# Altium PCB pneu-slave.PcbDoc
Units mil, origin at the board's own origin, x right, y up, seen from the top; angles counter-clockwise.
Board outline 1200 x 2000 mil, 2 copper layers (Top, Bottom); 42 components, 37 nets, 153 pads, 165 vias.
Unrouted connection lines stored in the file: 17.
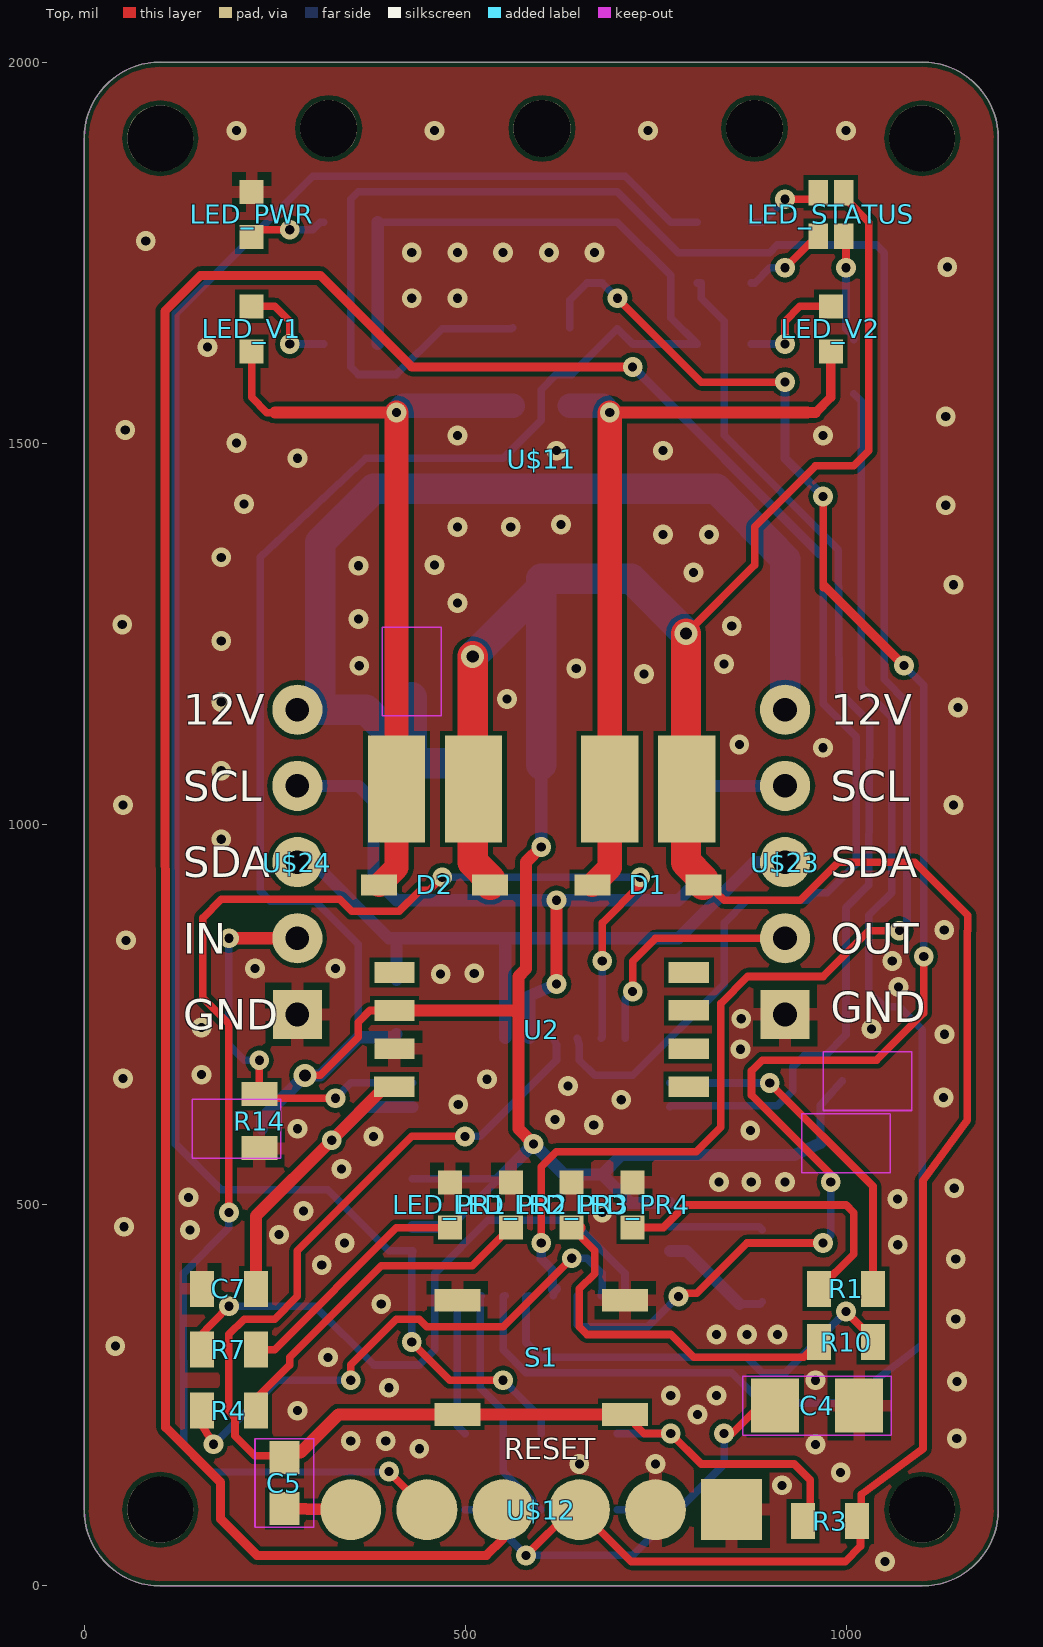
[diagram p0: Top view]
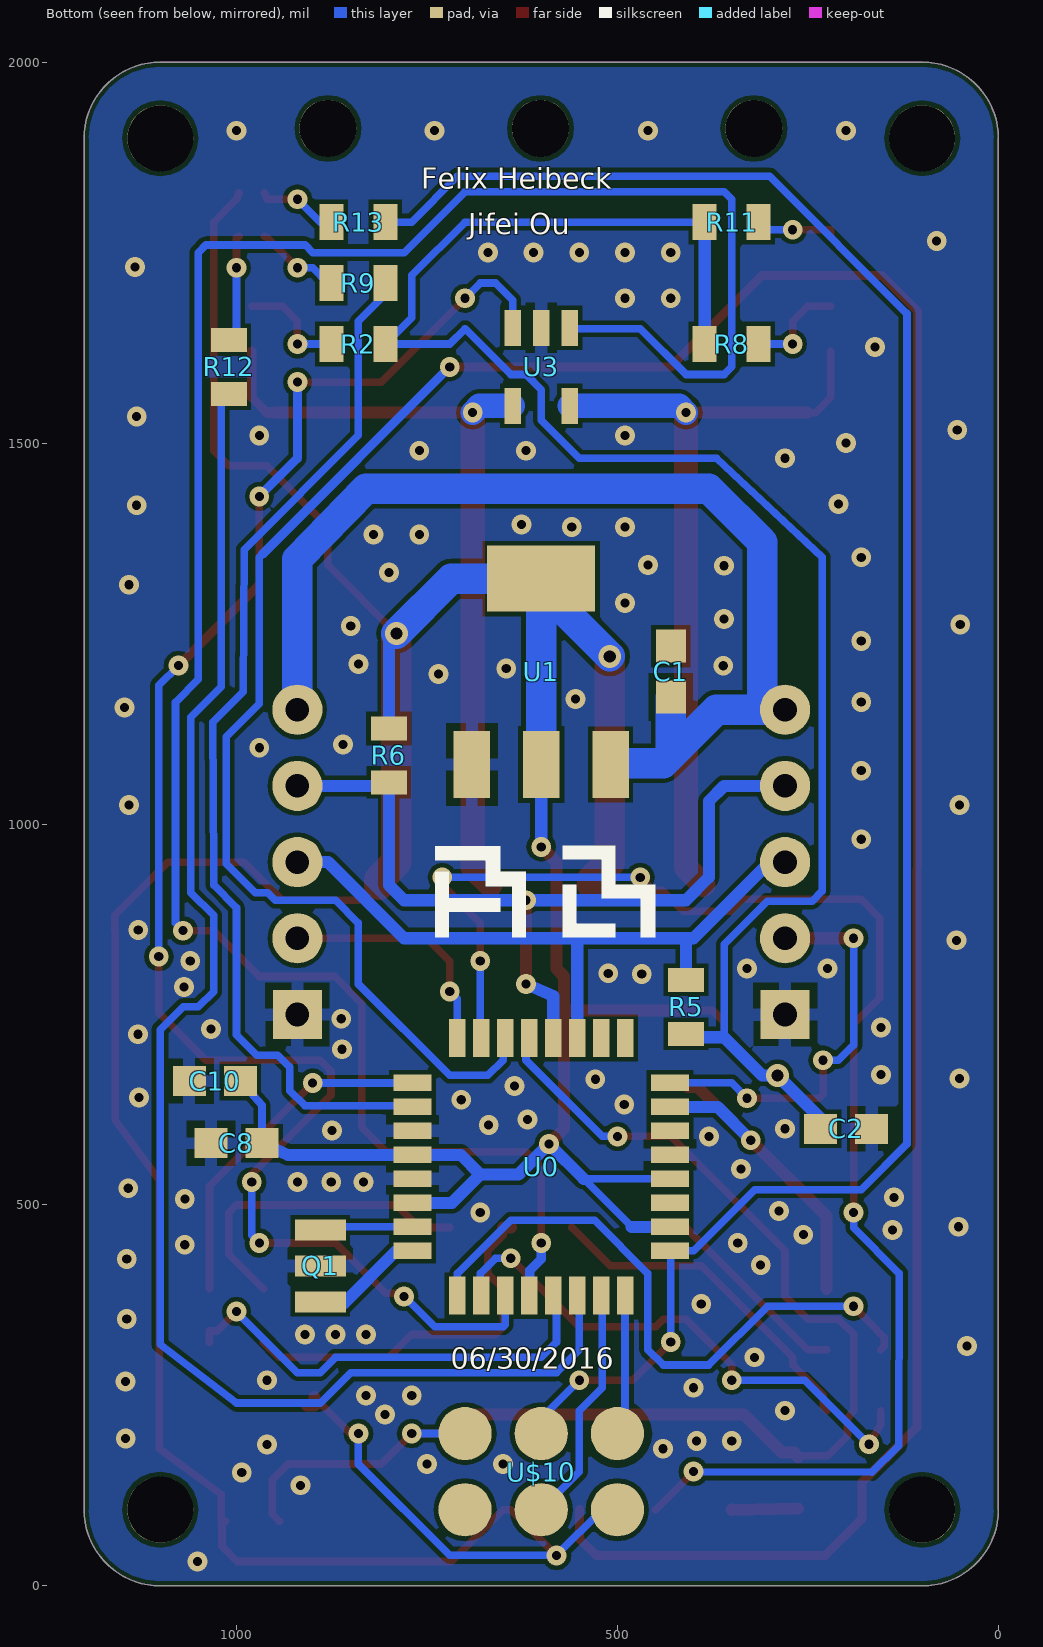
[diagram p1: Bottom view, seen from below]

## Layer stack, top to bottom
Top Solder: solder mask 0.4, Solder Resist, Dk 3.5
Top: signal copper 1.4016
Dielectric 1: dielectric 12.6, FR-4, Dk 4.8
Bottom: signal copper 1.4016
Bottom Solder: solder mask 0.4, Solder Resist, Dk 3.5

## Board outline
100,0 1100,0 ccw(c1100,100) 1200,100 1200,1900 ccw(c1100,1900) 1100,2000 100,2000 ccw(c100,1900) 0,1900 0,100 ccw(c100,100)

## Design rules (kind name [scope] priority, off if disabled: settings)
Clearance "Clearance (Same Net)" [All] p1: gap=6 ignorepadtopadclearanceinfootprint=FALSE
Clearance [All] p2: gap=6 ignorepadtopadclearanceinfootprint=FALSE
HoleSize HoleSize_For_NetClass_vcc [InNetClass('vcc')] p1: absolutevalues=TRUE maxlimit=0 minlimit=0 maxpercent=80.000 minpercent=20.000
HoleSize [All] p2: absolutevalues=TRUE maxlimit=100000 minlimit=12 maxpercent=80.000 minpercent=20.000
HoleToHoleClearance mdDrill [All] p1: gap=6 allowstackedmicrovias=TRUE
PasteMaskExpansion mlMinCreamFrame [All] p1: expansion=0
PolygonConnect ThermalVias [IsVia] p1: connectstyle=Direct reliefconductorwidth=10 reliefentries=4 polygonreliefangle="90 Angle" airgapwidth=10
PolygonConnect [All] p2: connectstyle=Relief reliefconductorwidth=16 reliefentries=4 polygonreliefangle="90 Angle" airgapwidth=10
RoutingVias [All] p1: holewidth=12 width=26 viastyle="Through Hole" minholewidth=12 minwidth=26 maxholewidth=100 maxwidth=100
SolderMaskExpansion mlMinStopFrame [All] p1: expansion=2.5
Width Width_For_NetClass_vcc [InNetClass('vcc')] p1: maxlimit=10 minlimit=10 preferedwidth=10
Width [All] p2: maxlimit=10000 minlimit=6 preferedwidth=6
27 further rules are at their usual default settings.

## Components (designator, comment, footprint, x,y, rotation, side; value= is the part's Value field where it differs from the comment)
C1 "0.1uF" 0603-CAP#1 330,1200 r270 bottom
C2 "0.1uF" 0603-CAP#2 100,600 r180 bottom
C4 "22uF" 1206 862.14,236.64 r0 top
C5 "0.1uF" 0603-CAP#3 163,135 r270 top
C7 "470pF" 0805#1 90,390 r0 top
C8 "0.1uF" 0603-CAP#4 900,581.11 r0 bottom
C10 "0.1uF" 0603-CAP#4 928.33,662.67 r0 bottom
D1 "" SOD-123 640,920 r180 top
D2 "" SOD-123 360,920 r180 top
LED_PR1 "" CHIPLED_0603#1 380,500 r0 top
LED_PR2 "" CHIPLED_0603#1 460,500 r0 top
LED_PR3 "" CHIPLED_0603#1 540,500 r0 top
LED_PR4 "" CHIPLED_0603#1 620,500 r0 top
LED_PWR "" CHIPLED_0603#1 120,1800 r0 top
LED_STATUS "" LTST 880,1800 r0 top
LED_V1 "" CHIPLED_0603#2 120,1650 r180 top
LED_V2 "" CHIPLED_0603#2 880,1650 r180 top
Q1 "16Mhz" RESONATOR-SMD 790,420 r270 bottom
R1 "1k" 0805#1 900,390 r0 top
R2 "1k" 0805#2 740,1630 r180 bottom
R3 "10K" 0805#2 879,85 r180 top
R4 "1k" 0805#2 90,230 r180 top
R5 "4.7k" 0805#3 310,760 r270 bottom
R6 "4.7k" 0805#3 700,1090 r270 bottom
R7 "1k" 0805#2 90,310 r180 top
R8 "1k" 0805#1 250,1630 r0 bottom
R9 "1k" 0805#2 740,1710 r180 bottom
R10 "1k" 0805#1 900,320 r0 top
R11 "1k" 0805#1 250,1790 r0 bottom
R12 "1k" 0805#4 910,1600 r90 bottom
R13 "1k" 0805#2 740,1790 r180 bottom
R14 "10k" 0805#3 130,610 r90 top
S1 "" TACTILE-SWITCH-SMD 500,300 r0 top
U0 "" TQFP32-08 500,550 r180 bottom
U1 "" LINEAR_SOT223 500,1200 r180 bottom
U2 "" MPXHZ6400 500,730 r0 top
U3 "QS5K2" SOT23-5L 500,1600 r0 bottom
U$10 "" POGO_ISP 500,150 r90 bottom
U$11 "" S070C-2 500,2000 r0 top
U$12 "" FTDI_POGO 500,100 r0 top
U$23 "" 1X05_TIGHT 820,950 r90 top
U$24 "" 1X05_TIGHT 180,950 r90 top

## Footprints (in the part's own frame and the unit in brackets; to place one, negate y for a bottom-side part, rotate by r counter-clockwise, add the part's x,y. Pads: shape width x height; smd on the part's side, far side on the other; paste and mask are expansions set on the pad)
1X05_TIGHT [mil] "1X05_TIGHT"
  round 66 / inner round 60 / far side round 66 hole 31: P$1(200,-100) P$2(0,-100) P$3(100,-100) P$4(-100,-100)
  rect 63.9x63.9 / inner rect 60x60 / far side rect 63.9x63.9 hole 31: P$5(-200,-100)
0603-CAP#1 [mm] "0603-CAP"
  rect 1.1x1 smd: 1(-0.85,-2.54) 2(0.85,-2.54)
  Bottom keep-out lines w0.051: 1.473,-1.557 1.473,-3.523 -1.473,-3.523 -1.473,-1.557 1.473,-1.557
0603-CAP#2 [mm] "0603-CAP"
  rect 1.1x1 smd: 1(-3.39,0) 2(-1.69,0)
  Bottom keep-out lines w0.051: -1.067,-0.983 -4.013,-0.983 -4.013,0.983 -1.067,0.983 -1.067,-0.983
0603-CAP#3 [mm] "0603-CAP"
  rect 1.1x1 smd: 1(-0.85,2.54) 2(0.85,2.54)
  Top keep-out lines w0.051: 1.473,1.557 -1.473,1.557 -1.473,3.523 1.473,3.523 1.473,1.557
0603-CAP#4 [mm] "0603-CAP"
  rect 1.1x1 smd: 1(1.69,0) 2(3.39,0)
  Bottom keep-out lines w0.051: 1.067,0.983 1.067,-0.983 4.013,-0.983 4.013,0.983 1.067,0.983
0805#1 [mil] "0805"
  rect 31.5x47.24 smd: 1(64.57,0) 2(135.43,0)
0805#2 [mil] "0805"
  rect 31.5x47.24 smd: 1(-135.43,0) 2(-64.57,0)
0805#3 [mil] "0805"
  rect 31.5x47.24 smd: 1(-35.43,-100) 2(35.43,-100)
0805#4 [mil] "0805"
  rect 31.5x47.24 smd: 1(-35.43,100) 2(35.43,100)
1206 [mil] "1206"
  rect 62.99x70.87 smd: 1(44.88,0) 2(155.12,0)
  Top keep-out lines w2: 2.64,-38.7 2.64,38.7 197.36,38.7 197.36,-38.7 2.64,-38.7
CHIPLED_0603#1 [mil] "CHIPLED_0603"
  rect 31.5x31.5 smd: A(100,-29.53) C(100,29.53)
CHIPLED_0603#2 [mil] "CHIPLED_0603"
  rect 31.5x31.5 smd: A(-100,-29.53) C(-100,29.53)
FTDI_POGO [mil] "FTDI_POGO"
  rrect100% 80x80 smd: 1(-150,0) 2(-50,0) 3(50,0) 4(150,0) 5(250,0)
  rect 80x80 smd: 6(350,0)
LINEAR_SOT223 [mil] "LINEAR_SOT223"
  rect 48x88 smd: 1(-191,-122) 2(-100,-122) 3(-9,-122)
  rect 141.73x86.61 smd: 4(-100,122.01)
LTST [mm] "LTST"
  rect 0.65x0.85 smd: +(2.965,0.725) B(2.115,0.725) G(2.965,-0.725) R(2.115,-0.725)
MPXHZ6400 [mil] "MPXHZ6400"
  rect 53x27 smd: 1(-92.6,75.1) 2(-92.6,25.2) 3(-92.6,-24.9) 4(-92.8,-74.9) 5(293.5,-74.9) 6(293.8,-24.8) 7(293.7,25.3) 8(293.7,75.1)
POGO_ISP [mil] "POGO_ISP"
  rrect100% 70x70 smd: 1(-50,200) 2(50,200) 3(-50,100) 4(50,100) 5(-50,0) 6(50,0)
RESONATOR-SMD [mil] "RESONATOR-SMD"
  rect 27.56x66.93 smd: 1(-47.24,-100) 2(0,-100) 3(47.24,-100)
S070C-2 [mil] "S070C-2"
  rect 75x140 smd: 1-1(-90,-954) 1-2(11,-954) 2-1(190,-954) 2-2(291,-954)
  round 74.8 hole 74.8 unplated: MH1(-179,-87) MH2(380,-87) MH3(101,-87)
SOD-123 [mil] "SOD-123"
  rect 47.24x27.56 smd: A(-27.17,0) C(-172.83,0)
SOT23-5L [mil] "SOT23-5L"
  rect 21.65x47.24 smd: 1(62.6,-51.18) 2(100,-51.18) 3(137.4,-51.18) 4(137.4,51.18) 5(62.6,51.18)
TACTILE-SWITCH-SMD [mil] "TACTILE-SWITCH-SMD"
  rect 60x30 smd: 1(-10,75) 2(210,75) 3(-10,-75) 4(210,-75)
TQFP32-08 [mil] "TQFP32-08"
  rect 50x22 smd: 1(-269,110.24) 2(-269,78.74) 3(-269,47.24) 4(-269,15.75) 5(-269,-15.75) 6(-269,-47.24) 7(-269,-78.74) 8(-269,-110.24) 17(69,-110.24) 18(69,-78.74) 19(69,-47.24) 20(69,-15.75) 21(69,15.75) 22(69,47.24) 23(69,78.74) 24(69,110.24)
  rect 22x50 smd: 9(-210.24,-169) 10(-178.74,-169) 11(-147.24,-169) 12(-115.75,-169) 13(-84.25,-169) 14(-52.76,-169) 15(-21.26,-169) 16(10.24,-169) 25(10.24,169) 26(-21.26,169) 27(-52.76,169) 28(-84.25,169) 29(-115.75,169) 30(-147.24,169) 31(-178.74,169) 32(-210.24,169)

## Part data
C1 C2 C5 C8 C10: library part 0603-CAP, PackageName=0603-CAP
C4: library part 1206, PackageName=1206
C7 R1 R2 R3 R4 R5 R6 R7 R8 R9 R10 R11 R12 R13 R14: library part 0805, PackageName=0805
D1 D2: library part SOD-123, PackageName=SOD-123
LED_PR1 LED_PR2 LED_PR3 LED_PR4 LED_PWR LED_V1 LED_V2: library part CHIPLED_0603, PackageName=CHIPLED_0603
LED_STATUS: library part LTST, PackageName=LTST
Q1: library part RESONATOR-SMD, PackageName=RESONATOR-SMD
S1: library part TACTILE-SWITCH-SMD, PackageName=TACTILE-SWITCH-SMD
U0: library part TQFP32-08, PackageName=TQFP32-08
U1: library part LINEAR_SOT223, PackageName=LINEAR_SOT223
U2: library part MPXHZ6400, PackageName=MPXHZ6400
U3: library part SOT23-5L, PackageName=SOT23-5L
U$10: library part POGO_ISP, PackageName=POGO_ISP
U$11: library part S070C-2, PackageName=S070C-2
U$12: library part FTDI_POGO, PackageName=FTDI_POGO
U$23 U$24: library part 1X05_TIGHT, PackageName=1X05_TIGHT

## Free pads (board coordinates)
  round 86.61 hole 86.61 unplated: MH1(100,1900) MH2(1100,1900) MH3(1100,100) MH4(100,100)

## Via types
v1: diameter 26/26 (per signal layer), hole 12, Top to Bottom, tented both sides, 162 vias
v2: diameter 30/30 (per signal layer), hole 16, Top to Bottom, 3 vias

## Nets (pads, with @x,y where several pads share a name; then routed paths per layer and width w, separated by ;. In a path a pad name is that pad's centre, name@x,y a point inside that pad or via, vN(x,y) a via of type N, cw(c..) or ccw(c..) an arc to the next point about the centre after c; other vN are vias at no path point)
+5V: C2.1 C4.1 C8.1 C10.1 D1.C D2.C LED_STATUS.+ R2.2 R3.1 R5.1 R6.2 R8.2 R11.2 U0.4 U0.6 U0.18 U0.20 U1.2 U1.4 U2.2 U$10.2 U$11.1-2 U$11.2-2 U$12.4 | length 8594.3
  Top w10: v2(290,670) 310,670 360,720 360,740 375.2,755.2 U2.2 ; v1(580,40) 640,100 U$12.4 718,32 999,32 1019,52 1019,84.57 R3.1 1020,85.57 1020,120 1101.11,180 1101.11,532 1159,611 1159,859 1160,860 1160,880 1090,950 990,950 940,900 840,900 830,910 D1.C ; v2(790,1250) 880,1340 880,1390 960,1470 1010,1470 1030,1490 1030,1790 1000,1820 LED_STATUS.+ ; v1(840,200) 850,200 897.73,247.73 C4.1@900,250
  Top w16: U2.2@402.6,760 U2.2 564.8,755.2 570,750 ; v1(590,580) 570,600 570,750 ; v1(600,970) 580,950 580,810 570,800 570,750 ; C4.1@897.73,247.73 897.73,236.64 C4.1
  Top w40: v2(510,1220) 510,1047 U$11.1-2 510,1045 510,950 532.83,927.17 D2.C ; v2(790,1250) 790,1047 U$11.2-2 790,1045 790,950 812.83,927.17 D1.C
  Bottom w10: 360,720 360,842.11 303.31,898.8 244.43,898.8 231.1,912.13 231.1,1349.99 370,1480 550,1480 600,1530 600,1570 620,1590 640,1590 700,1650 720,1630 R2.2 770,1664.57 770,1720 700,1790 R11.2 ; U0.20 544.25,534.25 481.26,471.26 ; 500,100 520,100 v1(580,40) 720,40 840,160 v1(840,200) ; C8.1 966.54,631 C10.1
  Bottom w16: C2.1 233.46,613.46 v2(290,670) 310,670 360,720 405.43,720 410,724.57 ; R8.2 R11.2 ; U0.18 481.26,471.26 ; 544.25,534.25 v1(590,580) 630,540 680,540 ; v1(600,970) U1.2 ; U0.6 717.24,502.76 680,540 ; v2(790,1250) 800,1240 800,1125.43 ; C8.1 932.28,565.75 U0.4 705.75,565.75 680,540
  Bottom w40: v2(510,1220) 600,1310 U1.4 ; U1.2 U1.4 ; v2(790,1250) 717.99,1322.01 U1.4
A0/PRESSURE: C7.2 U0.23 U2.4 | length 471.6
  Top w16: C7.2 225.43,485.43 v1(325,585) 395.1,655.1 U2.4
  Bottom w16: v1(325,585) 368.74,628.74 U0.23
D2/OUT: U0.32 U$23.P$4 | length 317.5
  Top w10: v1(720,780) 720,820 750,850 U$23.P$4
  Bottom w10: U0.32 710.24,770.24 v1(720,780)
D3: R1.2 U0.1 | length 457.1
  Top w10: v1(900,660) 1035.43,524.57 R1.2
  Bottom w10: U0.1 770,660 v1(900,660)
D4: R9.2 U0.2 | length 1384.1
  Bottom w10: U0.2 770,630 910,630 930,650 930,681 945.6,696.6 973.25,696.6 1000,723.35 1000,890 1030,920 1030,940 1031.11,1133.33 991.11,1173.33 990,1360 840,1510 840,1660 810,1690 810,1710 R9.2
D5: R7.2 U0.9 | length 822.3
  Top w10: R7.2 150,314.57 150,326 v1(190,367)
  Bottom w10: v1(190,367) 303,367 380,290 440,290 460,310 460,410 530,480 640,480 710,410 710,390 U0.9
D6: R4.2 U0.10 | length 716.8
  Top w10: R4.2 154.57,211.43 v1(170,186) ; v1(350,270) 350,290 410,350 440,350 450,340 550,340 v1(640,430)
  Bottom w10: v1(170,186) 254,270 v1(350,270) ; v1(640,430) 660,430 680,410 680,390 U0.10
D7: U0.11 U3.3 | length 2229.3
  Top w10: v1(700,1690) 810,1580 v1(920,1580) ; v1(780,380) 780,384 804,384 870,450 v1(970,450) ; 970,1310 970,1312 ; v1(970,1430) 970,1312 ; 972,1312 970,1312 ; v1(980,530) 980,540 876,644 876,676 890,690 1040,690 1102,752 v1(1102,826)
  Top w12: 972,1312 v1(1076,1208)
  Bottom w10: U3.3 637.4,1687.4 660,1710 680,1710 v1(700,1690) ; U0.11 647.24,342.76 650,340 740,340 v1(780,380) ; v1(970,450) 980,460 v1(980,530) ; v1(1076,1208) 1102,1182 v1(1102,826)
  Bottom w12: v1(920,1580) 920,1480 v1(970,1430)
D8: U0.12 U3.1 | length 2990
  Top w10: v1(600,450) 600,550 620,570 803.32,570 835.48,602.16 835.48,764.37 871.03,799.92 969.92,799.92 1030,860 v1(1070,860)
  Bottom w10: U3.1 560,1650 470,1650 410,1590 360,1590 350,1600 350,1820 360,1830 700,1830 780,1750 900,1750 910,1760 1040,1760 1050,1750 1050,1190 1080,1160 1080,870 v1(1070,860) ; U0.12 U0.12@620,390
  Bottom w12: v1(600,450) 600,429 615,414 615,389 616,390 U0.12@620,390
D9: R10.2 U0.13 | length 594.6
  Top w10: v1(1000,360) 1025.43,334.57 1035.43,334.57 R10.2
  Bottom w10: U0.13 580,380 580,320 600,300 870,300 890,280 920,280 v1(1000,360)
D10: R12.2 U0.14 | length 1999.6
  Bottom w10: U0.14 550,380 550,310 580,280 850,280 890,240 1000,240 1100,317 1100,730 1070,760 1050,760 1030,780 1030,880 1060,910 1060,1140 1020,1180 1020,1554.57 1010,1564.57
DTR: C5.2 U$12.1 | length 87.2
  Top w16: C5.2 349.57,99.57 U$12.1
GND: C1.2 C2.2 C4.2 C7.1 C8.2 C10.2 LED_PR1.C LED_PR2.C LED_PR3.C LED_PR4.C LED_PWR.C Q1.2 R14.1 S1.1 S1.2 U0.3 U0.5 U0.21 U1.1 U2.3 U3.2 U$10.6 U$12.5 U$12.6 U$23.P$5 U$24.P$5 | length 30
  Bottom w10: 700,100 730,100
  other v1: 1051,32 916,132 993,149 650,160 750,160 440,180 960,185.56 350,190 396,190 1145.44,193.67 805,225 280,230 770,250 830,250 400,260 1145.56,268.44 960,270 320,300 41,315 830,330 870,330 910,330 1144,350.12 390,370 312,421 1144,429 1067.88,447.71 342,450 256,461 139,467 52.54,471.35 680,490 288,492 1067.78,508.01 137,510 1142,522 833.33,530 875.56,530 920,530 338,547 380,590 874.45,597.78 280,600 669,605 618,612 491,632 705,638 1128,641 635,656 529,665 51,666 154,671 861.36,704.33 1129.33,724 1033.44,731.01 154,733 862.47,744.32 1069,786.11 468,803 512,804 224.32,810.43 329.86,810.43 1060.67,820.11 54.8,847.32 1129,861 180,980 51,1025 1141,1025 180,1070 969.99,1100.01 860,1104.46 1147,1153 180,1160 555,1164 735,1197 646,1204 361.11,1207.78 840,1210 180,1240 850,1260 50,1262 360,1268.89 490,1290 1141,1314 800,1330 360,1338.89 460,1340 180,1350 760,1380 820,1380 490,1390 560,1390 626,1393 1131,1418.43 210,1420 280,1480 620,1490 760,1490 200,1500 490,1510 970,1510 54,1517 1131,1535 162,1626 430,1690 490,1690 1133,1731 430,1750 490,1750 550,1750 610,1750 670,1750 81,1765 200,1910 460,1910 740,1910 1000,1910
IN_PORT: R14.2 U0.24 U$24.P$4 | length 534.5
  Top w10: v1(230,690) R14.2 235.43,640 v1(330,640)
  Top w16: v1(190,850) U$24.P$4
  Bottom w10: v1(190,850) 190,710 210,690 v1(230,690) ; v1(330,640) 350.24,660.24 U0.24
M1_VGND: D1.A LED_V2.C U3.4 U$11.2-1 | length 1044.5
  Top w12: 960,1540 980,1560 LED_V2.C
  Top w14: 949.53,1540 960,1540
  Top w16: v1(690,1540) 949.53,1540
  Top w32: D1.A 690,942.83 U$11.2-1 v1(690,1540)
  Bottom w32: U3.4 681.18,1548.82 v1(690,1540)
M2_VGND: D2.A LED_V1.C U3.5 U$11.1-1 | length 1044.5
  Top w10: LED_V1.C 220,1560 240,1540 250.47,1540
  Top w16: 250.47,1540 v1(410,1540)
  Top w32: D2.A 410,942.83 U$11.1-1 v1(410,1540)
  Bottom w32: v1(410,1540) 418.82,1548.82 U3.5
MISO: U0.16 U$10.1 | length 185.2
  Bottom w10: U0.16 490,380 490,210 500,200
MOSI: U0.15 U$10.4 | length 314.7
  Bottom w10: U0.15 520,380 520,260 550,230 550,150 600,100
N$1: LED_PR2.A R4.1 | length 449.1
  Top w10: R4.1 230,234.57 230,250 270,290 270,300 390,420 509.53,420 LED_PR2.A
N$3: LED_PR1.A R7.1 | length 321
  Top w10: R7.1 250,310 410,470 479.53,470 LED_PR1.A
N$4: Q1.1 U0.8 | length 151
  Bottom w10: 860,370 887.24,370 890,372.76
  Bottom w16: U0.8 790.24,439.76 860,370
N$5: LED_PR4.A R1.1 | length 432.9
  Top w10: LED_PR4.A 760.47,470.47 790,500 1000,500 1010,490 1010,435.43 R1.1 R1.1@970,395.43
N$6: LED_V2.A R2.1 | length 142.7
  Top w10: v1(920,1630) 920,1660 939.53,1679.53 LED_V2.A
  Bottom w10: R2.1 v1(920,1630)
N$7: LED_V1.A R8.1 | length 132.7
  Top w10: LED_V1.A 250.47,1679.53 270,1660 v1(270,1630)
  Bottom w10: v1(270,1630) R8.1
N$8: Q1.3 U0.7 | length 122.7
  Bottom w10: U0.7 885.98,471.26 890,467.24
N$9: LED_PR3.A R10.1 | length 496
  Top w10: LED_PR3.A@650,470 650,460 670,440 670,410 650,390 650,340 660,330 770,330 800,300 944.57,300 R10.1
  Top w16: LED_PR3.A LED_PR3.A@650,470
N$10: LED_PWR.A R11.1 | length 108.2
  Top w10: LED_PWR.A 220,1780 v1(270,1780)
  Bottom w10: v1(270,1780) 300,1780 310,1790 R11.1
N$11: LED_STATUS.R R9.1 | length 113
  Top w10: v1(920,1730) 960,1770 LED_STATUS.R
  Bottom w10: R9.1 880,1710 900,1730 v1(920,1730)
N$12: LED_STATUS.G R12.1 | length 142.3
  Top w10: LED_STATUS.G 1000,1770 v1(1000,1730)
  Bottom w10: v1(1000,1730) 1000,1650 1010,1640 1010,1635.43
N$13: LED_STATUS.B R13.1 | length 106.1
  Top w10: v1(920,1820) 960,1820 LED_STATUS.B
  Bottom w10: R13.1 890,1790 v1(920,1820)
RESET: C5.1 R3.2 S1.3 S1.4 U0.29 U$10.5 | length 1735.5
  Top w10: C5.1 262.43,171 224,171 198,197 198,220 190,230 190,330 210,350 250,350 280,380 280,440 430,590 v1(500,590) ; S1.4 735,200 v1(770,200) 810,160 932,160 953,139 953,94.43 R3.2
  Top w16: C5.1 267.57,175 284,175 334,225 S1.3 S1.4
  Bottom w10: v1(500,590) 520,590 620,690 620,710 U0.29 ; 700,200 v1(770,200)
RX: U0.30 U$12.3 | length 4072.6
  Top w12: U$12.3 550,62 528,40 227,40 179,88 179,136 107,208 107,212 106,1673 153,1720 310,1720 430,1600 v1(720,1600)
  Bottom w10: U0.30 650,710 650,690 670,670 720,670 840,790 840,870 870,900 948.89,900 958.8,909.91 975.47,909.91 1013.24,947.68 1013.24,1114.33 969.91,1157.66 969.91,1349.87 965.47,1354.31
  Bottom w12: v1(720,1600) 960,1360 960,1359.78 965.47,1354.31
SCK: R13.2 U0.17 U$10.3 | length 2594.2
  Top w10: v1(430,320) 480,270 v1(550,270)
  Bottom w10: v1(430,320) 430,430 U0.17 430,440 400,440 320,520 180,520 120,580 120,1670 300,1850 710,1850 770,1790 R13.2 ; v1(550,270) 600,220 600,200
SCL: R6.1 U0.28 U$23.P$3 U$24.P$3 | length 1109.8
  Top w16: v1(620,790) v1(620,900)
  Bottom w16: U$24.P$3 360,1050 380,1030 380,930 410,900 v1(620,900) 780,900 800,920 800,1054.57 804.57,1050 U$23.P$3 ; U0.28 584.25,774.25 v1(620,790)
SDA: R5.2 U0.27 U$23.P$2 U$24.P$2 | length 909.6
  Bottom w16: U$24.P$2 300,950 400,850 410,850 ; 410,795.43 410,850 ; U0.27 552.76,847.24 550,850 ; U$23.P$2 880,950 780,850 550,850 ; 410,850 550,850
TX: U0.31 U$12.2 | length 1927.7
  Top w10: v1(190,490) 190,737.7 155.55,772.15 155.55,876.58 179.99,901.02 335.53,901.02 351.09,885.47 413.3,885.47 441.08,913.24 453.24,913.24 v1(470,930) ; v1(400,150) U$12.2 ; v1(680,820) 680,870 730,920 v1(730,930)
  Bottom w10: v1(190,490) 190,470 130,410 131,184 166,149 v1(400,150) ; v1(470,930) v1(730,930) ; U0.31 680,720 v1(680,820)
VIN: C1.1 U1.3 U$23.P$1 U$24.P$1 | length 1437.1
  Bottom w16: U1.3 510,1078 U1.3@510,1070
  Bottom w40: U$24.P$1 U$24.P$1@310,1150 ; 430,1166.54 430,1100 425,1095 ; U1.3 507,1080 440,1080 425,1095 ; U$23.P$1 920,1347.78 830,1440 380,1440 310,1370 U$24.P$1@310,1150 ; U$24.P$1@310,1150 370,1150 425,1095
pads on no net: U0.19 U0.22 U0.25 U0.26 U2.1 U2.5 U2.6 U2.7 U2.8 U$11.MH1 U$11.MH2 U$11.MH3

## Polygon pours and split planes (outlines as drawn)
GND on Bottom "Polygon_1_Net_GND" (solid, remove dead copper, pour order 0): 2,2177.93 1218,2188.07 1218,-117.93 2,-128.07
GND on Top "Polygon_2_Net_GND" (solid, remove dead copper, pour order 1): -48,2148 1218,2148 1218,-98 -48,-98

## Keep-outs
Keep-Out Layer:
  the board outline again, w0

## Silkscreen, mask and mechanical layers (free items; w line width, h text height)
Top Overlay:
  text "12V" at 130,1130 h40
  text "12V" at 980,1130 h40
  text "SCL" at 130,1030 h40
  text "SCL" at 980,1030 h40
  text "SDA" at 130,930 h40
  text "SDA" at 980,930 h40
  text "IN" at 130,830 h40
  text "OUT" at 980,830 h40
  text "GND" at 980,740 h40
  text "GND" at 130,730 h40
  text "RESET" at 551.66,156.74 h46.5
Bottom Overlay:
  drawing of 354 lines, arcs and shapes, not listed
  text "Felix Heibeck" at 757.66,1824.72 h46.5
  text "Jifei Ou" at 695.48,1764.72 h46.5
  text "06/30/2016" at 718.89,275.62 h46.5
Dimension:
  the board outline again, w0
Top Assembly:
  lines w10: 420,890 420,950 ; 700,890 700,950
  text "PWR" at 180.14,1753.33 h62 r90
  text "STAT" at 1065.61,1738.73 h62 r90
  text "LEFT" at 300,1250 h108.5 r90
  text "RIGHT" at 954.32,1250 h108.5 r90

## Text inside footprints (layer, text, board x,y; h text height)
U1: Top Assembly "2" at 650.81,1029.63 h49.6; Top Assembly "1" at 735.93,1030 h49.6; Top Assembly "4" at 525,1300 h49.6; Top Assembly "3" at 559.81,1030 h49.6
U$10: Top Assembly "ISP" at 750,120 h49.6 r270